# Altium PCB DA1.PcbDoc
Units mm, origin at the board's own origin, x right, y up, seen from the top; angles counter-clockwise.
Board outline 94.89 x 74.3 mm, 2 copper layers (Top Layer, Bottom Layer); 70 components, 74 nets, 261 pads, 32 vias.
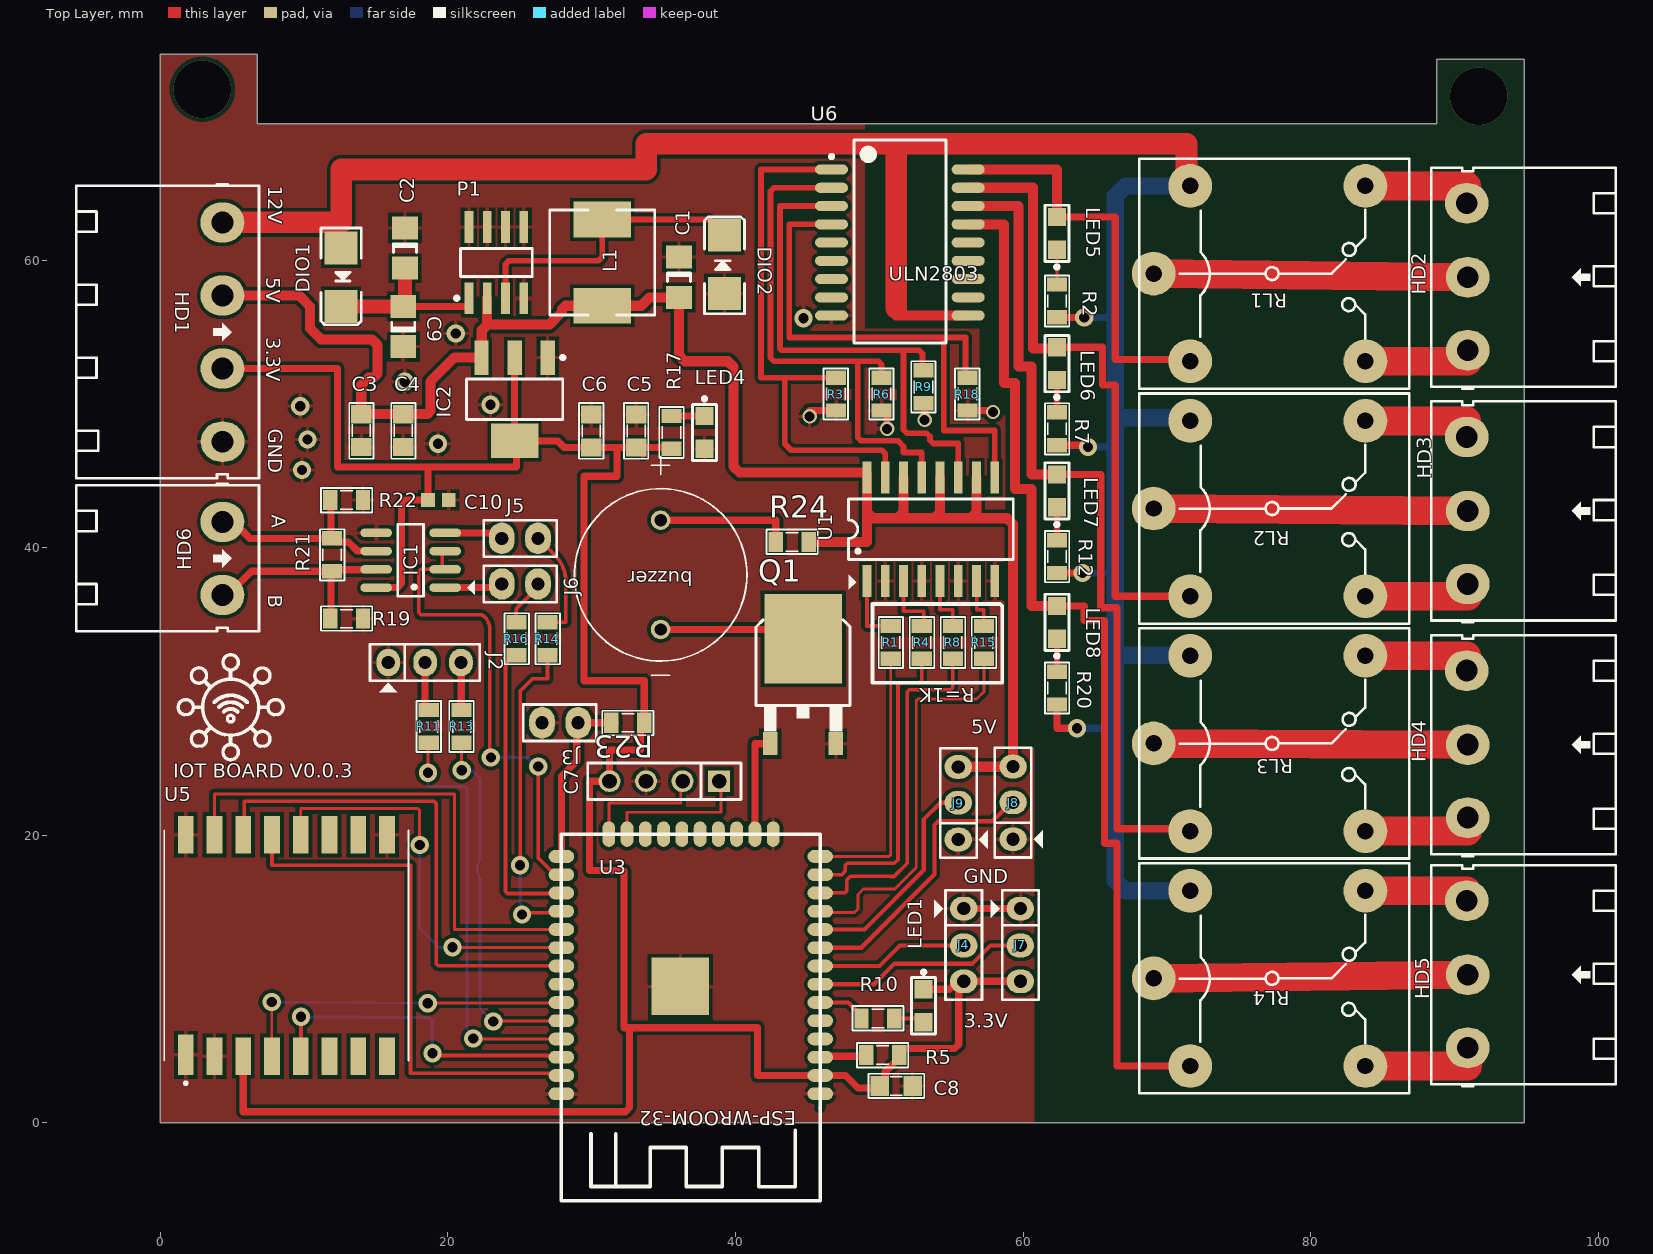
[diagram p0: Top Layer view]
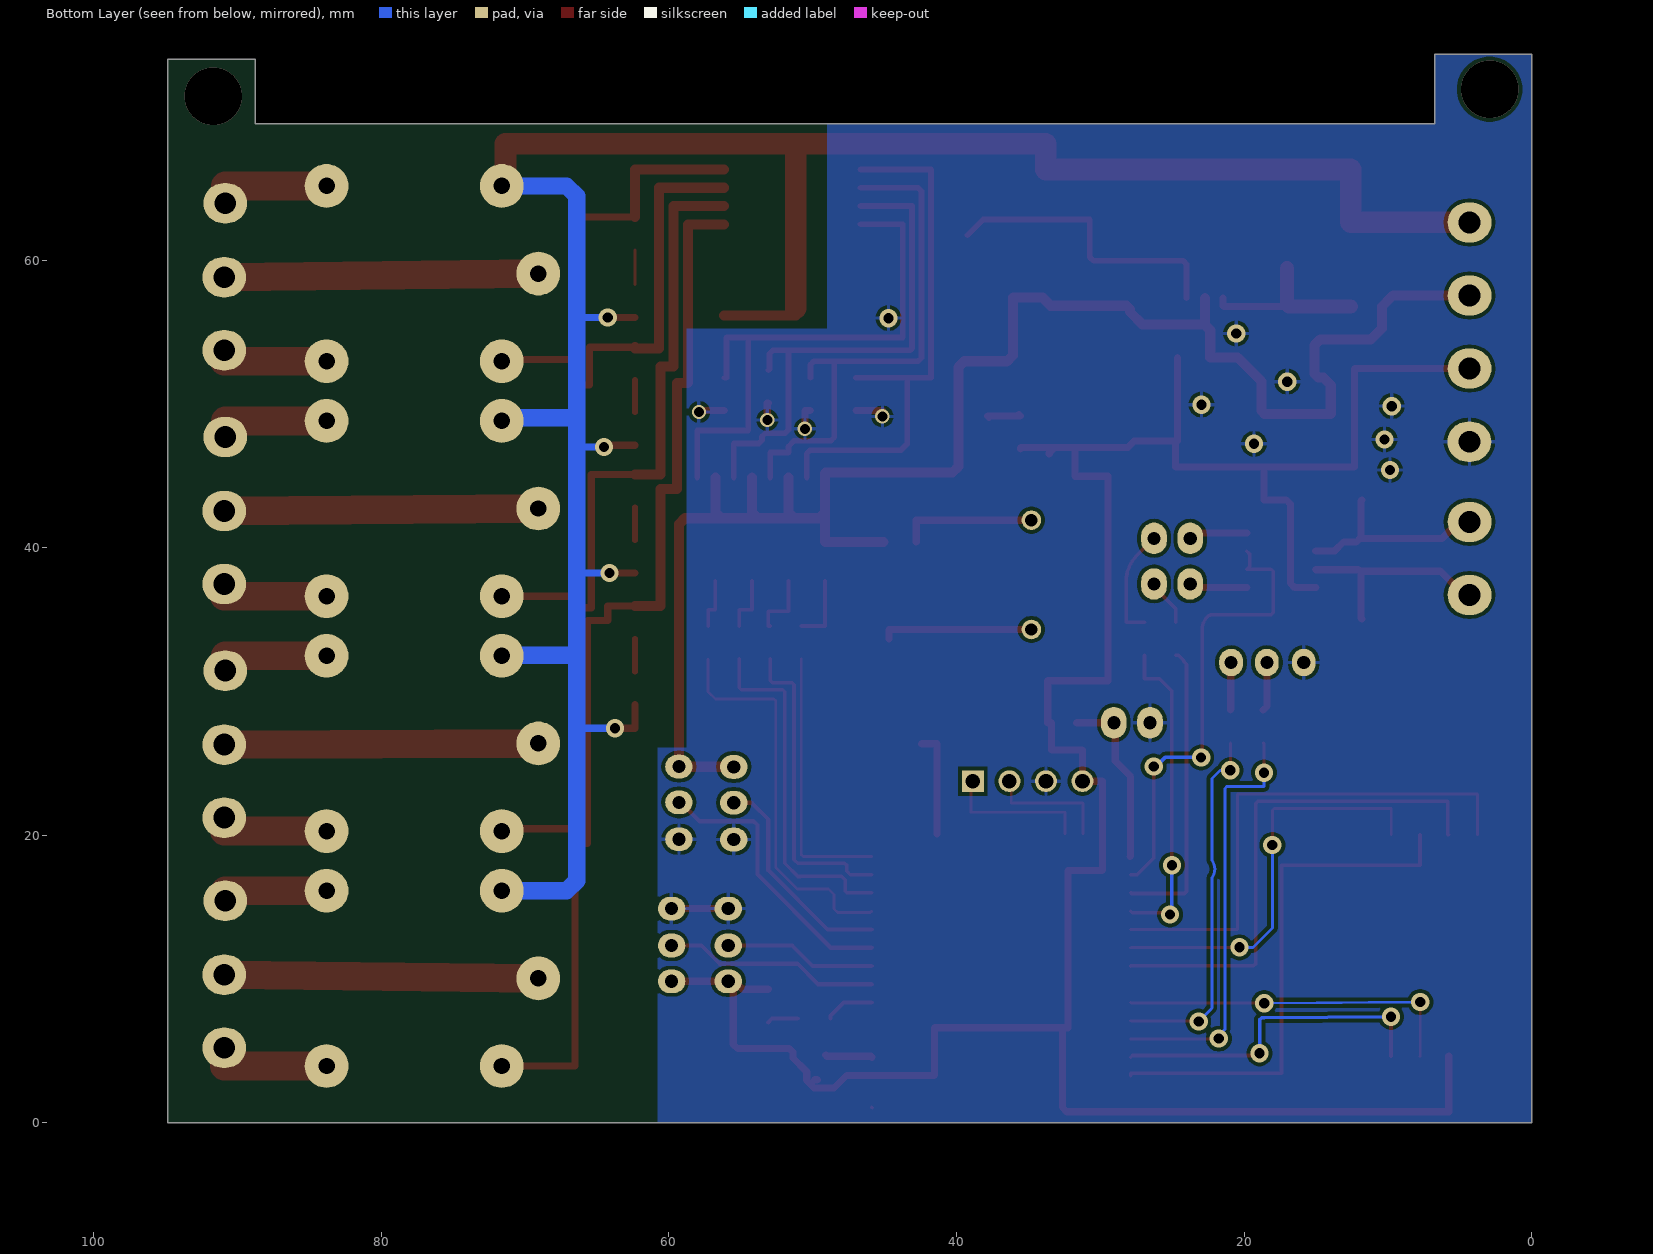
[diagram p1: Bottom Layer view, seen from below]
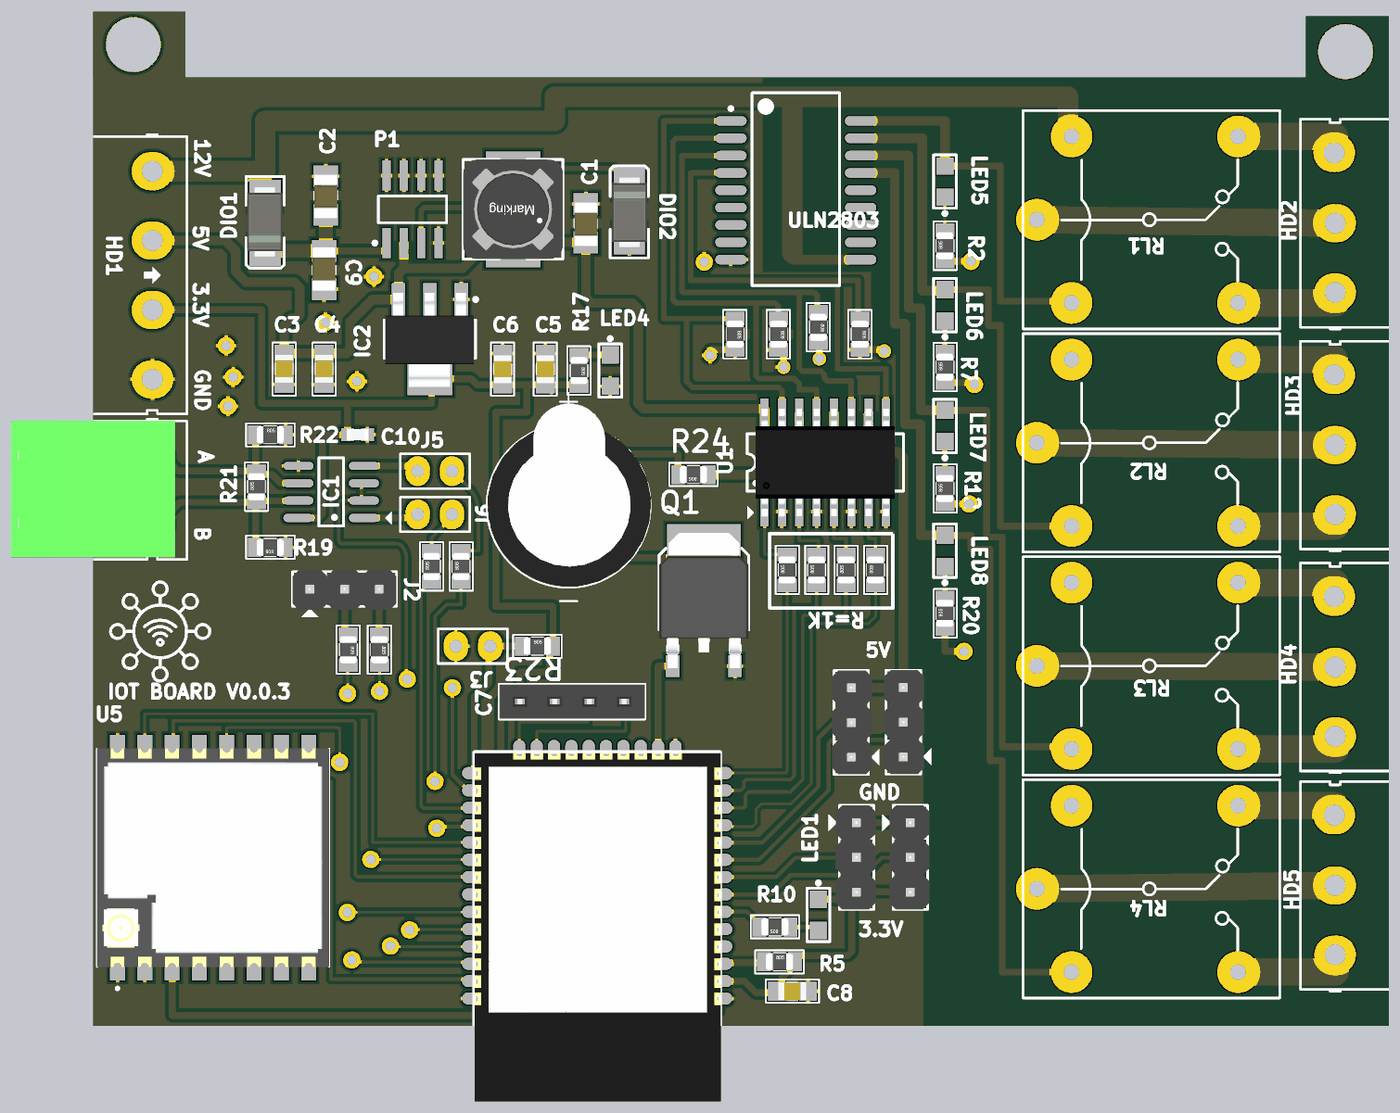
[diagram p2: 3D render of the assembled board from above, using the file's embedded part models]

## Layer stack, top to bottom
Top Solder: solder mask 0.0102, Solder Resist, Dk 3.5
Top Layer: signal copper 0.0356
Dielectric 1: dielectric 0.32, FR-4, Dk 4.8
Bottom Layer: signal copper 0.0356
Bottom Solder: solder mask 0.0102, Solder Resist, Dk 3.5

## Board outline
88.773,69.469 88.773,73.979 94.869,73.979 94.869,69.469 94.869,0 0,0 0,69.469 -0.021,69.49 -0.021,74.302 6.724,74.302 6.731,69.469

## Design rules (kind name [scope] priority, off if disabled: settings)
Clearance [All] p1: gap=0.254 ignorepadtopadclearanceinfootprint=FALSE
PolygonConnect [All] p1: connectstyle=Relief reliefconductorwidth=0.254 reliefentries=4 polygonreliefangle="90 Angle" airgapwidth=0.254
RoutingVias [All] p1: holewidth=0.711 width=1.27 viastyle="Through Hole" minholewidth=0.711 minwidth=1.27 maxholewidth=0.711 maxwidth=1.27
SolderMaskExpansion [All] p1: expansion=0.102 istentingtop=FALSE
Width [All] p1: maxlimit=2 minlimit=0.2 preferedwidth=0.5 minimp=50.000000 maximp=50.000000 favimp=50.000000
30 further rules are at their usual default settings.

## Components (designator, comment, footprint, x,y, rotation, side; value= is the part's Value field where it differs from the comment)
buzzer "buzzer" buzzer 34.798,38.1 r0 top
C1 "CAPSMD" 1206 36.068,58.801 r270 top value=103uf
C2 "CAPSMD" 1206 17.018,60.833 r270 top value=103uf
C3 "CAPSMD" SM-0805 13.97,48.131 r90 top value=103uf
C4 "CAPSMD" SM-0805 16.891,48.131 r90 top value=103uf
C5 "CAPSMD" SM-0805 33.101,48.105 r270 top value=103uf
C6 "CAPSMD" SM-0805 29.972,48.105 r270 top value=103uf
C7 "OLED" JP4-C1T 38.862,23.749 r180 top
C8 "CAPSMD" SM-0805 51.181,2.54 r180 top value=103uf
C9 "CAPSMD" 1206 16.891,55.372 r90 top value=103uf
C10 "Cap" SMT0603 19.341,43.307 r0 top value=0.1pF
DIO1 "Diode SMD" DIO-SMD-106 12.573,58.801 r90 top value=1N5007
DIO2 "Diode SMD" DIO-SMD-106 39.243,59.69 r270 top value=1N5007
HD1 "Header 4" HED4T 4.318,62.611 r270 top
HD2 "Header 3" HED3T 90.932,53.723 r90 top
HD3 "Header 3" HED3T 90.932,37.465 r90 top
HD4 "Header 3" HED3T 90.932,21.209 r90 top
HD5 "Header 3" HED3T 90.932,5.207 r90 top
HD6 "Header 2" HED2T 4.318,41.783 r270 top
IC1 "MAX485" SO-8 17.412,39.116 r180 top
IC2 "ams1117" SOT223-4N 24.638,50.313 r270 top
J2 "Jumper 3" JP3 18.39,32.004 r0 top value=J3
J3 "Jumper 2" J2 29.058,27.813 r180 top value="JP 2"
J4 "Jumper 3" JP3 55.88,12.344 r270 top value=J3
J5 "Jumper 2" J2 23.749,40.64 r0 top value="JP 2"
J6 "Jumper 2" J2 23.749,37.465 r0 top value="JP 2"
J7 "Jumper 3" JP3 59.817,12.344 r270 top value=J3
J8 "Jumper 3" JP3 59.309,22.25 r90 top value=J3
J9 "Jumper 3" JP3 55.499,22.225 r90 top value=J3
L1 "1.0 μH" L-SMD-M-7.3x4.5 30.734,59.817 r0 top
LED1 "LED3" LED0805 53.086,8.128 r270 top
LED4 "LED3" LED0805 37.846,48.006 r270 top
LED5 "" LED0805 62.357,61.849 r90 top
LED6 "" LED0805 62.357,52.792 r90 top
LED7 "" LED0805 62.357,43.942 r90 top
LED8 "" LED0805 62.357,34.798 r90 top
P1 "XL1509" SOIC-8 23.368,59.817 r90 top
Q1 "IRFR024N" FET-SMD 44.704,31.155 r0 top
R1 "Res" RES-SMD-0805 50.8,33.401 r90 top
R2 "Res" RES-SMD-0805 62.357,57.15 r90 top
R3 "Res" RES-SMD-0805 46.99,50.673 r270 top
R4 "Res" RES-SMD-0805 52.959,33.401 r90 top
R5 "Res" RES-SMD-0805 50.241,4.699 r0 top
R6 "Res" RES-SMD-0805 50.165,50.673 r270 top
R7 "Res" RES-SMD-0805 62.357,48.26 r90 top
R8 "Res" RES-SMD-0805 55.118,33.401 r90 top
R9 "Res" RES-SMD-0805 53.086,51.181 r270 top
R10 "Res" RES-SMD-0805 49.911,7.239 r180 top
R11 "Res" RES-SMD-0805 18.669,27.559 r270 top
R12 "Res" RES-SMD-0805 62.357,39.37 r90 top
R13 "Res" RES-SMD-0805 20.955,27.559 r270 top
R14 "Res" RES-SMD-0805 26.924,33.655 r90 top
R15 "Res" RES-SMD-0805 57.277,33.401 r90 top
R16 "Res" RES-SMD-0805 24.765,33.655 r90 top
R17 "Res" RES-SMD-0805 35.56,48.006 r270 top
R18 "Res" RES-SMD-0805 56.134,50.673 r270 top
R19 "Res" RES-SMD-0805 12.954,35.052 r180 top
R20 "Res" RES-SMD-0805 62.357,30.226 r90 top
R21 "Res" RES-SMD-0805 11.938,39.497 r90 top
R22 "Res" RES-SMD-0805 12.954,43.307 r0 top
R23 "Res" RES-SMD-0805 32.512,27.813 r0 top
R24 "Res" RES-SMD-0805 43.942,40.386 r180 top
RL1 "Relay 10A/12V" RL_SPDT_10A 69.088,59.057 r0 top value="Relay SPDT, 10A, 12V"
RL2 "Relay 10A/12V" RL_SPDT_10A 69.088,42.714 r0 top value="Relay SPDT, 10A, 12V"
RL3 "Relay 10A/12V" RL_SPDT_10A 69.088,26.374 r0 top value="Relay SPDT, 10A, 12V"
RL4 "Relay 10A/12V" RL_SPDT_10A 69.088,10.033 r0 top value="Relay SPDT, 10A, 12V"
U1 "tlp280-4" SOP16 53.594,41.275 r0 top
U3 "ESP 32" "ESP 32" 36.449,9.525 r180 top
U5 "RA-02_LORA" MODULE_RA-02_LORA 8.763,12.319 r90 top
U6 "ULN2803" "SOIC 18" 51.435,61.214 r0 top

## Footprints (in the part's own frame and the unit in brackets; to place one, negate y for a bottom-side part, rotate by r counter-clockwise, add the part's x,y. Pads: shape width x height; smd on the part's side, far side on the other; paste and mask are expansions set on the pad)
1206 [mm] "Chip Capacitor; Body 3.2 x 1.6 mm (LxW typ)"
  rect 1.6x1.8 smd: 1(-1.4,0) 2(1.4,0)
  silkscreen extent -0.3,-0.8 0.3,0.8, body extent -1.52,-0.85 1.68,0.85, height 1.72
buzzer [mm]
  round 1.358 hole 0.85: N(0,-3.8) P(0,3.8)
  silkscreen extent -6,-6.98 6,8.25, body extent -5.95,-5.94 6.05,7.5, height 9.19
DIO-SMD-106 [mil]
  rect 90x90.55 smd: 1(80,0) 2(-80,0)
  silkscreen extent -130,-55 135,55, body extent -99,-50 106,52, height 95
"ESP 32" [mil]
  oval 70x35 smd: 0(-372,296) 1(-372,246) 2(-372,196) 3(-372,146) 4(-372,96) 5(-372,46) 6(-372,-4) 7(-372,-54) 8(-372,-104) 9(-372,-154) 10(-372,-204) 11(-372,-254) 12(-372,-304) 13(-372,-354) 24(337,-354) 25(337,-304) 26(337,-254) 27(337,-204) 28(337,-154) 29(337,-104) 30(337,-54) 31(337,-4) 32(337,46) 33(337,96) 34(337,146) 35(337,196) 36(337,246) 37(337,296)
  oval 35x70 smd: 14(-243,-415) 15(-193,-415) 16(-143,-415) 17(-93,-415) 18(-43,-415) 19(7,-415) 20(57,-415) 21(107,-415) 22(157,-415) 23(207,-415)
  rect 157.5x157.5 smd: 38(11,2)
  Top Layer lines w10: -371,334 -372,333
  silkscreen extent -372,-415 337,589, body extent -375,-413 337,593, height 118
FET-SMD [mm]
  rect 1x1.6 smd: 1(-2.28,-4.8) 3(2.28,-4.8)
  rect 5.4x6.2 smd: 4(0,2.5)
  silkscreen extent -3.27,-3.94 3.27,3.83, body extent -3.27,-4.95 3.27,4.95, height 2.51
HED2T [mil] "Header 2, 2 pin, hight 300mil, Pin to Pin 200, Colour Green"
  oval 110x120 hole 60: 1(0,0) 2(200,0)
  silkscreen extent -105,-400 300,100, body extent -100,-406 294,66, height 334
HED3T [mil] "Header 3, 3 pin, hight 300mil, Pin to Pin 200, Colour Green"
  oval 110x120 hole 60: 1(0,0) 2(200,0) 3(402.62,2.62)
  silkscreen extent -105,-405 500,100
HED4T [mil] "Header 4, 4 pin, hight 300mil, Pin to Pin 200, Colour Green"
  oval 110x120 hole 60: 1(0,0) 2(200,0) 3(400.06,0.06) 4(600.39,0.39)
  silkscreen extent -105,-400 700,100
J2 [mil] "Jum select vdd or gnd"
  oval 70x86 hole 36: 1(0,0) 2(99,0)
  silkscreen extent -50,-50 150,50
JP3 [mil] "Jumper 3"
  oval 65x75 hole 36: 1(-100,0) 2(1,0) 3(99,0)
  silkscreen extent -150,-81 150,50, body extent -150,-60 150,55, height 355
JP4-C1T [mm] "4 row, straight, gold plating"
  rect 1.52x1.52 hole 1.02: 1(0,0)
  round 1.52 hole 1.02: 2(2.54,0) 3(5.08,0) 4(7.62,0)
  silkscreen extent -1.52,-1.27 9.14,1.27, body extent -1.52,-1.25 9.14,1.25, height 8.51
L-SMD-M-7.3x4.5 [mm] "WE-PDA SMD Shielded Power Inductor, 7345"
  rect 4x2.5 smd: 1(0,3) 2(0,-3)
  silkscreen extent -3.65,-3.65 3.65,3.65, body extent -3.65,-3.65 3.65,3.65, height 4.05
LED0805 [mil] "Chip Resistor; Body 2.0 x 1.3 mm (LxW typ)"
  rect 50x50 smd: 1(-45,0) 2(45,0)
  silkscreen extent -97,-33 77,33, body extent -60,-25 60,25, height 47
MODULE_RA-02_LORA [mm]
  rect 2.8x1.1 smd: 1(-7.6,7)
  rect 2.6x1.1 smd: 2(-7.7,5) 3(-7.7,3) 4(-7.7,1) 5(-7.7,-1) 6(-7.7,-3) 7(-7.7,-5) 8(-7.7,-7) 9(7.7,-7) 10(7.7,-5) 11(7.7,-3) 12(7.7,-1) 13(7.7,1) 14(7.7,3) 15(7.7,5) 16(7.7,7)
  silkscreen extent -9.68,-8.5 8,8.5, body extent -8,-8.5 8,8.5, height 3.3
RES-SMD-0805 [mil]
  rect 39.37x55 smd: 1(-45,0) 2(45,0)
  silkscreen extent -70,-34 70,33, body extent -39,-25 39,25, height 31
RL_SPDT_10A [mil] "Relay SPDT, 5 pin, 10A,W 650mil, L 800mil, H 800mil"
  round 120 hole 45: 1(0,0) 2(580,240) 3(580,-240) 4(100,-240) 5(100,240)
  silkscreen extent -40,-315 700,315
SM-0805 [mil] "Compoment SMD 80x50mil"
  rect 50x55 smd: 1(-45,0) 2(45,0)
  silkscreen extent -77,-34 76,33, body extent -40,-25 40,25, height 24
SMT0603 [mm]
  rect 0.95x0.95 smd: 1(-0.725,0) 2(0.725,0)
  body extent -0.8,-0.43 0.8,0.43, height 0.48
SO-8 [mm] "8-Pin Small Outline Integrated Circuit 1.27 mm Pitch, IPC Medium Density"
  oval 2.2x0.6 smd: 1(-2.4,1.905) 2(-2.4,0.635) 3(-2.4,-0.635) 4(-2.4,-1.905) 5(2.4,-1.905) 6(2.4,-0.635) 7(2.4,0.635) 8(2.4,1.905)
  silkscreen extent -4.44,-2.5 0.9,2.5, body extent -1.95,-2.45 1.95,2.45, height 1.75
"SOIC 18" [mm] "16-Pin Small Outline Integrated Circuit 1.27 mm Pitch, IPC Low Density"
  oval 2.3x0.7 smd: 1(-4.75,5.08) 2(-4.75,3.81) 3(-4.75,2.54) 4(-4.75,1.27) 5(-4.75,0) 6(-4.75,-1.27) 7(-4.75,-2.54) 8(-4.75,-3.81) 9(-4.75,-5.08) 10(4.75,-5.08) 11(4.75,-3.81) 12(4.75,-2.54) 13(4.75,-1.27) 14(4.75,0) 15(4.75,1.27) 16(4.75,2.54) 17(4.75,3.81) 18(4.75,5.08)
  silkscreen extent -4.87,-6.98 3.2,7.13, body extent -3.8,-6.98 3.8,7.13, height 2.68
SOIC-8 [mm] "SOIC, 8-Leads, Body 5,0x4,0mm (max), Pitch 1,27mm, IPC Medium Density"
  rect 2.2x0.6 smd: 1(-2.475,1.905) 2(-2.475,0.635) 3(-2.475,-0.635) 4(-2.475,-1.905) 5(2.475,-1.905) 6(2.475,-0.635) 7(2.475,0.635) 8(2.475,1.905)
  silkscreen extent -2.6,-2.5 0.98,2.88, body extent -3.2,-2.5 3.2,2.5, height 1.75
SOP16 [mm] "Small Outline; 16 Leads; Body Width 5.6 mm; Pitch 1.27 mm"
  rect 0.6x2.2 smd: 1(-4.445,-3.6) 2(-3.175,-3.6) 3(-1.905,-3.6) 4(-0.635,-3.6) 5(0.635,-3.6) 6(1.905,-3.6) 7(3.175,-3.6) 8(4.445,-3.6) 9(4.445,3.6) 10(3.175,3.6) 11(1.905,3.6) 12(0.635,3.6) 13(-0.635,3.6) 14(-1.905,3.6) 15(-3.175,3.6) 16(-4.445,3.6)
  silkscreen extent -5.73,-4.19 5.73,2.1, body extent -5.1,-3.96 5.1,3.96, height 1.8
SOT223-4N [mm] "SOT223, 4-Leads, Body 6.5x3.5mm, Pitch 2.3mm, Lead Span 7mm, IPC Medium Density"
  rect 2.4x1 smd: 1(-2.9,2.3) 2(-2.9,0) 3(-2.9,-2.3)
  rect 2.4x3.3 smd: 4(2.9,0)
  silkscreen extent -3.02,-3.35 1.4,3.48, body extent -3.39,-3.27 3.5,3.23, height 1.72

## Part data
buzzer: "ELECTRO-MECHANICAL AUDIO INDICATOR", Package="2225 PUI Audio", Availability="In Stock", MF="PUI Audio,", MP=AI-1223-TWT-12V-R, Price=None, Purchase-URL=https://pricing.snapeda.com/search/part/AI-1223-TWT-12V-R/?ref=eda
C1 C2 C3 C4 C5 C6 C8 C9: "Cap SMD"
C7: library part JP4, "WR-PHD 2.54 mm Angled Socket Header", Manufacturer="W¨¹rth Elektronik eiSos GmbH", partNo=613004143121, ComponentLink1 Description=Manufacturer, ComponentLink1URL=http://www.we-online.com, ComponentLink2 Description=Datasheet, ComponentLink2URL=http://katalog.we-online.de/em/datasheet/6130xx143121.pdf, Created by="Karrer Zheng", Created Date="29 March 2013", NoPins=04
C10: library part CAP-SM-0603-NC, "CAP SM 0603 NC", Tolerance=±10%
DIO1 DIO2: "Default Diode", Code - JEDEC=DO-214-AB, Published=8-Jun-2000, Publisher="Altium Limited", Revision="July-2002: Re-released for DXP Platform."
HD1: library part Hed4, "Header 4 (Green)"
HD2 HD3 HD4 HD5: library part Hed3, "Header 3 (Green)"
HD6: library part Hed2, "Header 2 (Green)"
IC1: "RS232 - RS485 (Same sn75176)"
IC2: "AMS 1117 : output 3.3,5,... (SOT223-4P)"
J2 J4 J7 J8 J9: library part JP3
J3 J5 J6: library part "JP 2"
L1: library part L-SMD-1, Manufacturer="Wurth Elektronik", partNo=78477010, ComponentLink1Description=Manufacturer, ComponentLink1URL=http://www.we-online.de, ComponentLink2Description=Datasheet, ComponentLink2URL=http://katalog.we-online.de/pbs/datasheet/78477010.pdf, Created by="Baojun Chen", Created Date=Nov.2015, Inductance="1.0 μH"
LED1 LED4 LED5 LED6 LED7 LED8: library part LEDSMD, "LED 3mm"
Q1: "N-Channel 55 V 17A (Tc) 45W (Tc) Surface Mount D-Pak", Package="TO-252 International Rectifier", Availability="In Stock", Check_prices=https://www.snapeda.com/parts/IRFR024N/Infineon%20Technologies/view-part/346952/?ref=eda, MF="Infineon Technologies", MP=IRFR024N, Price=None, Purchase-URL=https://pricing.snapeda.com/search/part/IRFR024N/?ref=eda, SnapEDA_Link=https://www.snapeda.com/parts/IRFR024N/Infineon%20Technologies/view-part/346952/?ref=snap
R1 R2 R3 R4 R5 R6 R7 R8 R9 R10 R11 R12 R13 R14 R15 R16 R17 R18 R19 R20 R21 R22 R23 R24: library part Res-SMD, "Resistor", Manufacturer="Generic Components", Class=Passive, Published=08/06/2000, Publisher="Altium Hobart Technology Centre"
RL1 RL2 RL3 RL4: library part "Relay 1_1", "Relay SPDT,10A - 12VDC 5 Pin"
U5: "Ra-02 LoRa RF M5Stack Platform Evaluation Expansion Board", Package=None, Availability="Not in stock", Check_prices=https://www.snapeda.com/parts/Ra-02%20LoRa/AI-Thinker/view-part/?ref=eda, MF=AI-Thinker, MP="Ra-02 LoRa", Price=None, SnapEDA_Link=https://www.snapeda.com/parts/Ra-02%20LoRa/AI-Thinker/view-part/?ref=snap
U6: library part ULN2803_1, "Darlington Transistor Arrays"

## Via types
v1: diameter 1.27, hole 0.711, Top Layer to Bottom Layer, 26 vias
v2: diameter 1, hole 0.7, Top Layer to Bottom Layer, 4 vias
v3: diameter 4, hole 4, Top Layer to Bottom Layer, 2 vias

## Nets (pads, with @x,y where several pads share a name; then routed paths per layer and width w, separated by ;. In a path a pad name is that pad's centre, name@x,y a point inside that pad or via, vN(x,y) a via of type N, cw(c..) or ccw(c..) an arc to the next point about the centre after c; other vN are vias at no path point)
3.3: C5.2 C6.2 C7.4 C8.2 C10.1 HD1.3 IC1.8 IC2.2 IC2.4 J4.3 J7.3 LED1.1 R5.2 R17.2 R23.2 U3.1 U5.3 | length 188.4
  Top Layer w0.5: HD1.3 12.319,52.449 12.319,45.593 18.616,45.593 ; U5.3 5.763,0.762 32.346,0.762 32.639,1.055 32.639,6.604 ; IC1.8 16.471,37.211 16.764,37.504 16.764,43.014 17.057,43.307 C10.1 18.616,45.593 ; IC2.2 IC2.4 IC2.4@24.765,47.413 ; C5.2@33.549,46.514 33.549,46.577 33.164,46.962 C5.2 ; R17.2 35.56,46.962 C5.2 ; C8.2@49.661,2.989 C8.2@49.872,2.989 ; LED1.1 54.883,9.271 55.442,9.83 J4.3 ; J7.3 J4.3 ; 18.616,45.593 24.765,45.593 IC2.4@24.765,47.413 ; IC2.4@24.765,47.413 27.644,47.413 28.095,46.962 C6.2 31.75,46.962 ; 31.75,46.962 C5.2 ; 31.75,46.962 31.75,44.958 29.464,44.958 29.464,30.734 33.655,30.734 R23.2 33.401,27.813 33.401,25.908 31.242,25.908 C7.4 29.845,23.749 29.845,17.526 32.258,17.526 32.258,6.604 32.639,6.604 ; 32.639,6.604 41.529,6.604 41.529,3.277 U3.1 47.65,3.277 48.514,2.413 49.911,2.413 C8.2 50.423,2.925 50.423,3.539 51.384,4.501 R5.2 51.384,4.897 51.634,5.148 55.24,5.148 55.533,5.44 55.533,9.483 J4.3
+5: C1.2 C3.2 C4.2 HD1.2 IC2.3 J8.3 J9.3 L1.2 P1.2 R24.1 U1.10 U1.12 U1.14 U1.16 | length 121.9
  Top Layer w0.7: HD1.2 9.652,57.531 9.778,57.405 10.414,56.769 10.414,55.245 11.176,54.483 14.703,54.483 15.113,54.073 15.113,52.099 14.83,51.816 14.478,51.816 13.97,51.308 C3.2 C4.2 16.893,49.276 18.562,49.276 18.796,49.51 18.796,51.562 20.447,53.213 IC2.3 22.352,53.227 22.352,55.118 22.733,55.499 ; P1.2 22.733,55.499 ; R24.1 49.149,40.386 49.149,42.447 ; U1.14 51.689,42.447 51.279,42.037 ; U1.12 54.229,42.447 53.819,42.037 ; J9.3 55.512,24.752 59.296,24.752 J8.3 59.309,41.627 58.899,42.037 56.359,42.037 ; U1.10 56.769,42.447 56.359,42.037 ; 22.733,55.499 27.051,55.499 27.94,56.388 27.94,56.583 28.174,56.817 L1.2 33.449,56.817 34.033,57.401 C1.2 36.068,53.369 36.478,52.959 39.468,52.959 39.878,52.549 39.878,45.622 40.288,45.212 49.099,45.212 49.149,45.162 U1.16 49.149,42.447 ; 49.149,42.447 49.559,42.037 51.279,42.037 ; 51.279,42.037 53.819,42.037 ; 53.819,42.037 56.359,42.037
+12: C2.2 C9.2 DIO1.2 P1.1 | length 12.1
  Top Layer w0.5: C9.2 21.413,56.772 21.463,56.822 P1.1
  Top Layer w1: DIO1.2 16.888,56.769 C9.2 17.018,56.899 C2.2
A: HD6.1 IC1.6 R21.2 R22.1 | length 14.3
  Top Layer w0.5: HD6.1 5.066,41.783 6.209,40.64 R21.2 ; R22.1 11.874,43.243 11.874,40.703 R21.2 ; IC1.6 14.993,39.77 13.697,39.77 13.077,40.39 12.188,40.39 R21.2
B: HD6.2 IC1.7 R19.2 R21.1 | length 14.7
  Top Layer w0.5: HD6.2 4.679,36.703 6.33,38.354 11.811,38.354 R21.1@11.875,38.29 ; R19.2 11.875,35.115 R21.1@11.875,38.29 ; IC1.7 14.993,38.462 12.046,38.462 R21.1 R21.1@11.875,38.29
CLK: U3.29 U5.12 | length 28.8
  Top Layer w0.2: U5.12 9.763,21.844 17.917,21.844 18.034,21.727 v1(18.034,19.304) ; v1(20.32,12.192) 20.333,12.179 27.877,12.179 U3.29
  Bottom Layer w0.2: v1(18.034,19.304) 18.034,13.529 19.371,12.192 v1(20.32,12.192)
CS: U3.28 U5.15 | length 36.4
  Top Layer w0.2: U5.15 3.763,22.86 20.447,22.86 20.447,13.437 U3.28
GND: C1.1 C2.1 C3.1 C4.1 C5.1 C6.1 C7.3 C8.1 C9.1 C10.2 DIO2.1 HD1.4 IC1.5 IC2.1 J2.1 J3.2 J4.1 J7.1 J8.1 J9.1 LED4.2 P1.4 P1.5 P1.6 P1.7 P1.8 Q1.3 R3.2 R6.2 R9.2 R18.2 R19.1 R22.2 U1.2 U1.4 U1.6 U1.8 U3.0 U3.14 U3.37 U3.38 U5.1 U5.2 U5.9 U5.16 U6.9 | length 10.9
  Top Layer w0.5: v2(45.161,49.124) 45.161,49.53 R3.2 ; R6.2 50.546,49.53 v2(50.546,48.26) ; R9.2 53.162,50.038 v2(53.162,48.87) ; J4.1 J7.1 ; R18.2 57.912,49.53 v2(57.912,49.428)
  other v1: 9.855,45.39 19.304,47.219 10.236,47.523 9.728,49.835 22.962,49.936 16.993,51.537 20.549,54.889 44.729,55.956
InU1: R3.1 U1.15 U6.1 | length 38.1
  Top Layer w0.4: U6.1 41.783,66.294 41.783,51.816 43.434,51.816 ; R3.1 43.434,51.816 ; U1.15 50.419,46.533 50.185,46.768 43.885,46.768 43.434,47.219 43.434,51.816
InU2: R6.1 U1.13 U6.2 | length 36.9
  Top Layer w0.4: U6.2 42.671,65.024 42.437,64.79 42.437,53.193 42.671,52.959 48.514,52.959 ; R6.1 50.165,52.725 49.931,52.959 48.514,52.959 ; U1.13 52.959,46.609 51.689,46.609 51.689,47.03 51.298,47.422 48.748,47.422 48.514,47.656 48.514,52.959
InU3: R9.1 U1.11 U6.3 | length 37
  Top Layer w0.4: U6.3 43.091,63.754 43.091,53.848 43.218,53.721 51.689,53.721 ; R9.1 53.01,52.4 53.01,53.487 52.775,53.721 51.689,53.721 ; U1.11 55.499,47.244 53.758,47.244 53.524,47.478 53.524,47.721 53.29,47.955 51.923,47.955 51.689,48.19 51.689,53.721
InU4: R18.1 U1.9 U6.4 | length 39.3
  Top Layer w0.4: U6.4 43.745,62.484 43.745,54.61 54.483,54.61 ; R18.1 56.007,51.816 56.007,54.61 54.483,54.61 ; U1.9 58.039,48.133 54.483,48.133 54.483,54.61
IO0: J3.1 R23.1 U3.24 | length 12.2
  Top Layer w0.5: U3.24@27.94,18.517 U3.24 27.889,24.079 28.956,25.146 J3.1@28.956,27.584 ; J3.1 R23.1 R23.1@31.648,27.813
IO4: IC1.2 IC1.3 U3.25 | length 32.8
  Top Layer w0.25: IC1.3 19.617,39.556 19.617,38.676 19.69,38.603 IC1.2@19.789,38.504 ; v1(22.987,25.4) 22.919,25.468 22.919,34.282 ccw(c21.618,34.282) 22.539,35.2 ccw(c22.231,34.895) 22.231,35.329 18.121,35.329 18.048,35.402 18.015,35.435 cw(c18.399,35.635) 17.966,35.635 17.966,38.348 18.039,38.421 18.072,38.455 cw(c18.272,38.07) 18.272,38.504 IC1.2@19.789,38.504 ; v1(26.289,24.765) 26.289,18.402 27.445,17.247 U3.25 ; IC1.2@19.789,38.504 IC1.2 19.789,38.481 IC1.2@19.789,38.504
  Bottom Layer w0.25: v1(22.987,25.4) 25.496,25.4 26.131,24.765 v1(26.289,24.765)
IO12: R1.1 U3.13 | length 18.6
  Top Layer w0.2: U3.13 50.683,18.517 50.8,18.634 R1.1
IO13: Q1.1 U3.15 | length 7.4
  Top Layer w0.5: U3.15 41.351,26.355 Q1.1
IO14: R4.1 U3.12 | length 21.5
  Top Layer w0.25: U3.12 47.395,17.247 47.625,17.477 47.625,17.888 47.771,18.034 51.054,18.034 51.308,18.288 51.308,30.461 51.454,30.607 52.813,30.607 52.959,30.753 R4.1
IO21: U3.32 U5.4 | length 23.9
  Top Layer w0.2: v1(7.747,8.382) 7.747,4.619 U5.4 ; v1(18.593,8.306) 18.618,8.331 27.864,8.331 U3.32
  Bottom Layer w0.2: v1(7.747,8.382) v1(18.593,8.306)
IO22: U3.35 U5.5 | length 23.4
  Top Layer w0.25: U5.5 9.779,4.619 v1(9.779,7.366) ; v1(18.923,4.826) 19.08,4.669 27.767,4.669 U3.35
  Bottom Layer w0.25: v1(9.779,7.366) 18.584,7.292 ccw(c18.593,8.306) 18.593,7.292 18.777,7.292 18.923,7.145 v1(18.923,4.826)
IO25: J9.2 U3.9 | length 15.3
  Top Layer w0.3: U3.9 48.975,13.437 53.086,17.547 53.086,21.082 54.254,22.25 J9.2
IO26: R15.1 U3.10 | length 27.5
  Top Layer w0.2: U3.10 45.999,14.605 48.26,14.605 48.514,14.859 48.514,15.875 48.895,16.256 51.082,16.256 52.578,17.752 52.578,29.347 52.695,29.464 56.769,29.464 57.277,29.972 R15.1
IO27: R8.1 U3.11 | length 24.6
  Top Layer w0.25: U3.11 47.606,15.977 47.752,16.123 47.752,16.891 48.006,17.145 50.8,17.145 50.823,17.122 51.031,17.122 51.943,18.034 51.943,29.953 52.089,30.099 54.972,30.099 55.118,30.245 R8.1
IO32: J4.2 U3.7 | length 10.6
  Top Layer w0.3: U3.7 50.013,10.897 51.435,12.319 J4.2
IO33: J8.2 U3.8 | length 19.6
  Top Layer w0.3: U3.8 48.743,12.167 53.848,17.272 53.848,20.701 54.102,20.955 57.861,20.955 59.182,22.276 J8.2
IO34: R10.2 U3.5 | length 3.4
  Top Layer w0.3: U3.5 47.849,8.357 48.768,7.437 R10.2
IO35: J7.2 U3.6 | length 15
  Top Layer w0.3: U3.6 49.632,9.627 51.064,11.059 56.486,11.059 57.746,12.319 J7.2
MISO: U3.30 U5.14 | length 35.7
  Top Layer w0.25: U5.14 5.842,20.019 5.842,22.352 19.031,22.352 19.177,22.206 19.177,11.068 19.323,10.922 27.889,10.922 U3.30
MOSI: U3.36 U5.13 | length 36.9
  Top Layer w0.25: U5.13 7.763,17.907 17.399,17.907 17.399,3.429 27.889,3.429 U3.36
MRX: IC1.1 J6.1 | length 4.2
  Top Layer w0.5: IC1.1 23.749,37.211 J6.1
MTX: IC1.4 J5.1 | length 4.3
  Top Layer w0.5: IC1.4 23.749,41.021 J5.1
NC: U3.31
Netbuzzer_N: buzzer.N Q1.4 | length 10.6
  Top Layer w0.5: buzzer.N 44.704,34.3 Q1.4
Netbuzzer_P: buzzer.P R24.2 | length 9.5
  Top Layer w0.5: buzzer.P 42.799,41.9 R24.2
NetDIO2_2: DIO2.2 L1.1 P1.3 | length 20.9
  Top Layer w0.4: P1.3 24.003,59.71 24.237,59.944 30.48,59.944 30.734,60.198 L1.1 38.141,62.817 39.236,61.722 DIO2.2
NetHD2_1: HD2.1 RL1.3 | length 8
  Top Layer w2: RL1.3 90.932,52.961 HD2.1 HD2.1@90.805,53.723
NetHD2_2: HD2.2 RL1.1 | length 22
  Top Layer w1.5: RL1.1 RL1.1@69.215,58.93 ; HD2.2@90.805,58.803 HD2.2
  Top Layer w2: RL1.1 HD2.2@90.805,58.803
NetHD2_3: HD2.3 RL1.2 | length 8.4
  Top Layer w2: RL1.2 90.865,65.153 HD2.3 HD2.3@90.738,63.949
NetHD3_1: HD3.1 RL2.3 | length 8.1
  Top Layer w2: RL2.3 90.932,36.618 HD3.1 HD3.1@90.805,37.465
NetHD3_2: HD3.2 RL2.1 | length 21.8
  Top Layer w2: RL2.1 90.805,42.545 HD3.2
NetHD3_3: HD3.3 RL2.2 | length 8.3
  Top Layer w2: RL2.2 90.865,48.81 HD3.3 HD3.3@90.738,47.692
NetHD4_1: HD4.1 RL3.3 | length 8.2
  Top Layer w2: RL3.3 90.932,20.278 HD4.1 HD4.1@90.805,21.209
NetHD4_2: HD4.2 RL3.1 | length 21.8
  Top Layer w2: RL3.1 90.805,26.289 HD4.2
NetHD4_3: HD4.3 RL3.2 | length 8.2
  Top Layer w2: RL3.2 90.865,32.47 HD4.3 HD4.3@90.738,31.436
NetHD5_1: HD5.1 RL4.3 | length 8.5
  Top Layer w2: RL4.3 90.932,3.937 HD5.1 HD5.1@90.805,5.207
NetHD5_2: HD5.2 RL4.1 | length 21.8
  Top Layer w2: RL4.1 90.805,10.287 HD5.2
NetHD5_3: HD5.3 RL4.2 | length 7.9
  Top Layer w2: RL4.2 90.865,16.129 HD5.3 HD5.3@90.738,15.434
NetJ2_2: J2.2 R11.1 | length 3.4
  Top Layer w0.5: J2.2 18.415,28.952 18.665,28.702 R11.1
NetJ2_3: J2.3 R13.1 | length 3.3
  Top Layer w0.5: J2.3 20.93,31.979 20.93,28.727 R13.1
NetJ5_2: J5.2 R14.2 | length 7.8
  Top Layer w0.25: J5.2 27.45,39.454 cw(c25.654,37.657) 28.194,37.657 28.194,34.798 R14.2
NetJ6_2: J6.2 R16.2 | length 3.3
  Top Layer w0.25: R16.2 24.765,35.763 26.264,37.262 J6.2
NetLED1_2: LED1.2 R10.1 | length 2.1
  Top Layer w0.3: R10.1 52.832,7.239 LED1.2
NetLED4_1: LED4.1 R17.1 | length 2.6
  Top Layer w0.5: R17.1@35.667,49.256 R17.1 37.739,49.149 37.739,49.042 LED4.1
NetLED5_1: LED5.1 R2.2 | length 2.4
  Top Layer w0.2: R2.2 LED5.1
NetLED6_1: LED6.1 R7.2 | length 2.2
  Top Layer w0.4: R7.2 LED6.1
NetLED7_1: LED7.1 R12.2 | length 2.3
  Top Layer w0.4: R12.2 LED7.1
NetLED8_1: LED8.1 R20.2 | length 2.3
  Top Layer w0.4: R20.2 LED8.1
NetR1_2: R1.2 U1.1 | length 4.8
  Top Layer w0.25: U1.1 49.149,34.544 R1.2
NetR4_2: R4.2 U1.3 | length 4.7
  Top Layer w0.25: U1.3 51.689,35.56 53.086,35.56 53.086,34.544 R4.2
NetR5_1: R5.1 U3.2 | length 3.3
  Top Layer w0.5: U3.2 45.972,4.621 49.02,4.621 R5.1
NetR8_2: R8.2 U1.5 | length 4
  Top Layer w0.25: U1.5 54.229,35.687 55.118,35.687 R8.2
NetR15_2: R15.2 U1.7 | length 3.6
  Top Layer w0.25: U1.7 56.769,35.687 57.277,35.687 R15.2
OutU1: LED5.2 RL1.4 U6.18 | length 28.8
  Top Layer w0.5: LED5.2 66.421,62.992 66.421,53.086 71.628,53.086 RL1.4
  Top Layer w0.7: U6.18 62.357,66.294 LED5.2
OutU2: LED6.2 RL2.4 U6.17 | length 44.6
  Top Layer w0.5: LED6.2 65.532,53.935 65.532,51.308 66.421,51.308 66.421,36.618 RL2.4
  Top Layer w0.7: U6.17 60.706,65.024 60.706,53.848 62.357,53.848 LED6.2 ; RL2.4@71.193,37.053 RL2.4
OutU3: LED7.2 RL3.4 U6.16 | length 58.9
  Top Layer w0.5: LED7.2 65.405,45.085 65.405,35.814 66.548,35.814 66.548,20.447 71.628,20.447 RL3.4
  Top Layer w0.7: U6.16 59.69,63.754 59.69,52.578 60.579,52.578 60.579,45.085 LED7.2
OutU4: LED8.2 RL4.4 U6.15 | length 74
  Top Layer w0.5: LED8.2 64.262,35.941 64.262,34.925 65.659,34.925 65.659,19.431 66.548,19.431 66.548,3.937 RL4.4
  Top Layer w0.7: U6.15 58.674,62.484 58.674,51.435 59.436,51.435 59.436,44.069 60.579,44.069 60.579,35.941 LED8.2
RXD0: R13.2 U3.33 | length 25.5
  Top Layer w0.2: v1(20.955,24.511) R13.2 ; v1(23.158,7.029) 23.187,7.058 27.861,7.058 U3.33
  Bottom Layer w0.2: v1(20.955,24.511) 20.976,24.49 21.673,24.49 22.225,23.937 22.225,18.22 ccw(c23.022,17.635) 22.225,17.05 22.225,7.963 22.284,7.904 v1(23.158,7.029)
RXD1: R16.1 U3.26 | length 20.9
  Top Layer w0.25: R16.1 24.567,32.512 24.192,32.137 24.192,32.071 24.003,31.883 24.003,16.081 24.149,15.935 27.847,15.935 27.847,15.977 U3.26
SCL: C7.2 U3.23 | length 8.8
  Top Layer w0.2: U3.23 31.191,22.225 36.195,22.225 36.195,23.749 C7.2
SDA: C7.1 U3.22 | length 10.3
  Top Layer w0.2: U3.22 32.461,21.59 38.989,21.59 38.989,23.749 C7.1
SENSOR_VN: U3.4
SENSOR_VP: U3.3
TXD0: R11.2 U3.34 | length 29.6
  Top Layer w0.2: v1(18.614,24.343) 18.614,26.416 R11.2 ; v1(21.759,5.845) 21.759,5.817 U3.34
  Bottom Layer w0.2: v1(18.614,24.343) 18.614,23.368 21.219,23.368 21.336,23.251 21.336,6.497 21.759,6.074 v1(21.759,5.845)
TXD1: R14.1 U3.27 | length 22.3
  Top Layer w0.25: v1(25.019,17.907) 25.019,30.01 25.87,30.861 26.924,30.861 R14.1 ; v1(25.146,14.478) 25.26,14.592 27.775,14.592 U3.27
  Bottom Layer w0.25: v1(25.019,17.907) 25.019,14.605 v1(25.146,14.478)
VIN: DIO1.1 HD1.1 R2.1 R7.1 R12.1 R20.1 RL1.5 RL2.5 RL3.5 RL4.5 U6.10 | length 180.9
  Top Layer w0.5: R20.1 62.357,27.432 v1(63.754,27.432) ; R12.1 v1(64.135,38.227) ; R7.1 64.516,47.117 v1(64.516,46.99) ; R2.1 v1(64.262,56.007) ; RL4.5 RL4.5@71.628,16.51 ; RL3.5 RL3.5@71.628,32.766 ; RL2.5 RL2.5@71.628,49.149 ; RL1.5 RL1.5@71.628,65.278
  Top Layer w0.7: 51.181,56.642 51.181,56.134 U6.10
  Top Layer w1.5: HD1.1 12.573,62.611 12.573,66.294 33.782,66.294 33.782,68.072 51.181,68.072 ; 51.181,56.642 51.181,68.072 ; RL1.5 71.374,65.153 71.374,68.072 51.181,68.072
  Bottom Layer w0.5: v1(63.754,27.432) 66.421,27.432 ; v1(64.135,38.227) 66.421,38.227 ; v1(64.262,56.007) 66.421,56.007 66.421,55.88 ; v1(64.516,46.99) 66.421,46.99
  Bottom Layer w1.2: 66.421,55.88 66.421,49.022 ; 66.421,56.007 66.421,64.45 67.124,65.153 RL1.5 ; RL4.5 67.124,16.129 66.421,16.832 66.421,27.432 66.421,32.512 ; RL3.5 71.586,32.512 66.421,32.512 ; RL2.5 71.416,49.022 66.421,49.022 ; 66.421,32.512 66.421,38.227 66.421,46.99 66.421,49.022
pads on no net: U3.16 U3.17 U3.18 U3.19 U3.20 U3.21 U5.6 U5.7 U5.8 U5.10 U5.11 U6.5 U6.6 U6.7 U6.8 U6.11 U6.12 U6.13 U6.14
copper on no net:
  other v3: 91.694,71.374 2.921,71.882

## Polygon pours and split planes (outlines as drawn)
GND on Bottom Layer "GND_L02_P001" (solid, pour order 1): 0,74.295 0,0 60.783,0 60.783,26.086 58.75,26.086 58.75,55.22 48.997,55.22 48.997,69.467 6.724,69.467 6.724,74.295
GND on Top Layer "GND_L01_P000" (solid, pour order 0): 0,74.295 0,0 60.783,0 60.783,26.086 58.75,26.086 58.75,50.368 56.947,50.368 56.947,55.22 48.997,55.22 48.997,69.467 6.724,69.467 6.724,74.295

## Silkscreen, mask and mechanical layers (free items; w line width, h text height)
Top Overlay:
  drawing of 12 lines, arcs and shapes, not listed
  text "12V" at 7.493,65.151 h1 r270
  text "5V" at 7.366,58.801 h1 r270
  text "ULN2803" at 50.673,58.547 h1
  text "3.3V" at 7.366,54.61 h1 r270
  text "GND" at 7.493,48.26 h1 r270
  text "A" at 7.747,42.291 h1 r270
  text "B" at 7.493,36.703 h1 r270
  text "R=1K" at 56.642,30.226 h1 r180
  text "5V" at 56.388,27.051 h1
  text "IOT BOARD V0.0.3" at 0.889,24.003 h1
  text "GND" at 55.88,16.637 h1
  text "3.3V" at 55.88,6.604 h1

## Text inside footprints (layer, text, board x,y; h text height)
U3: Top Overlay "ESP-WROOM-32" at 44.221,0.787 h1 r180